# Altium PCB PCB_MAIN_BOARD.PcbDoc
Units mm, origin at the board's own origin, x right, y up, seen from the top; angles counter-clockwise.
Board outline 70 x 130 mm, 2 copper layers (Top Layer, Bottom Layer); 42 components, 46 nets, 234 pads, 21 vias.
Unrouted connection lines stored in the file: 7.
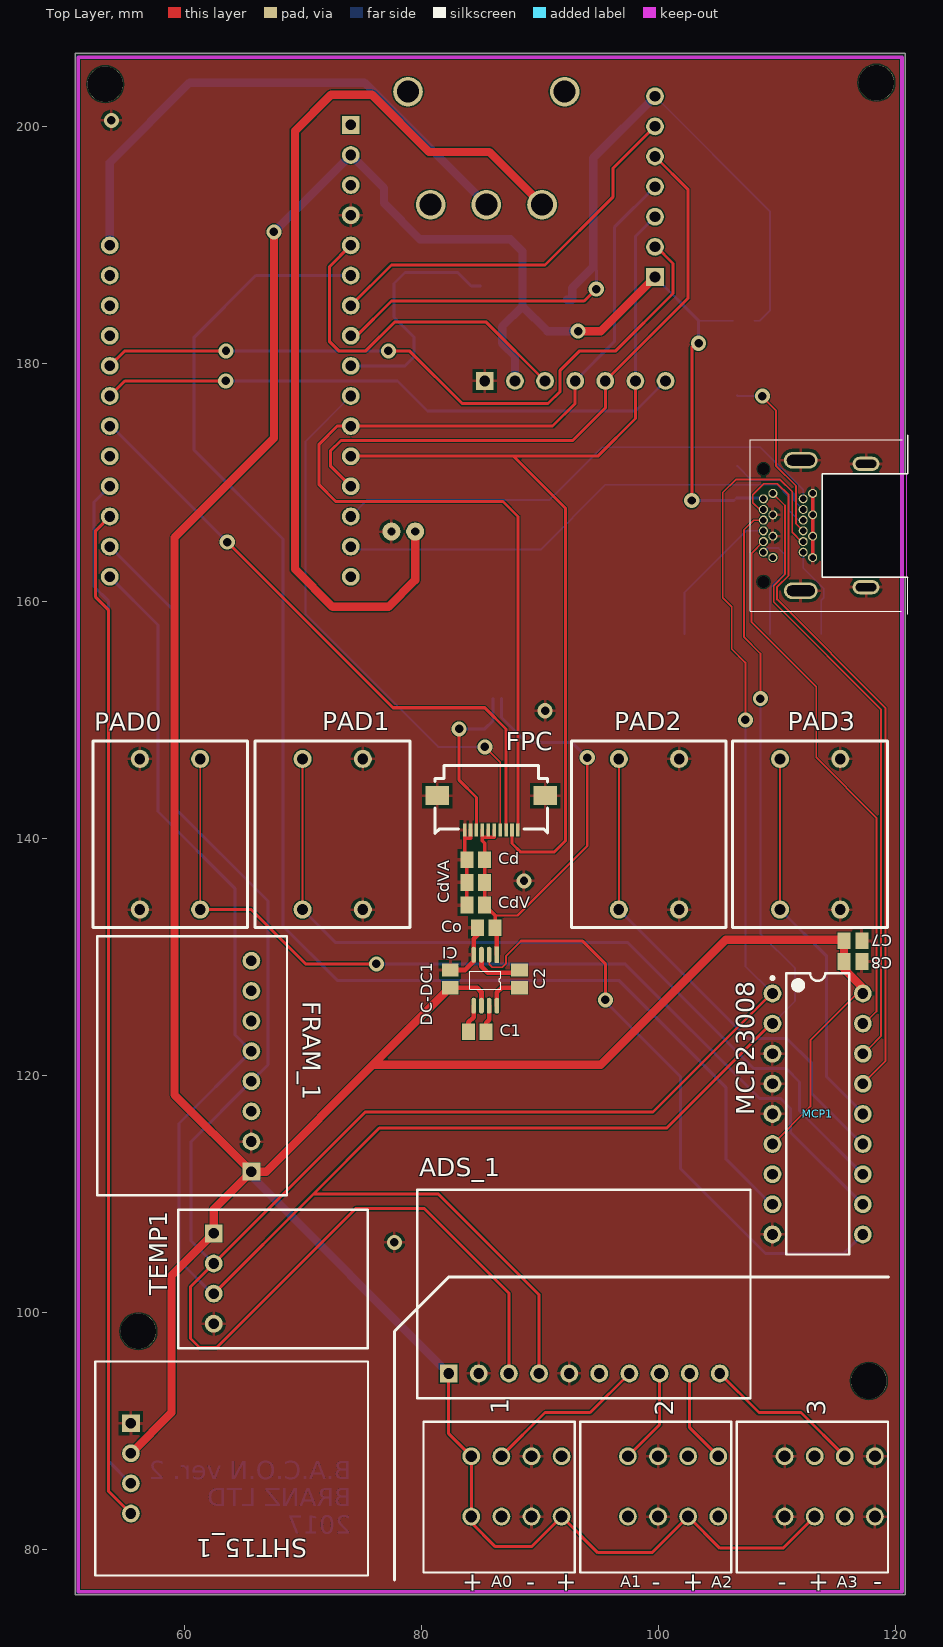
[diagram p0: Top Layer view]
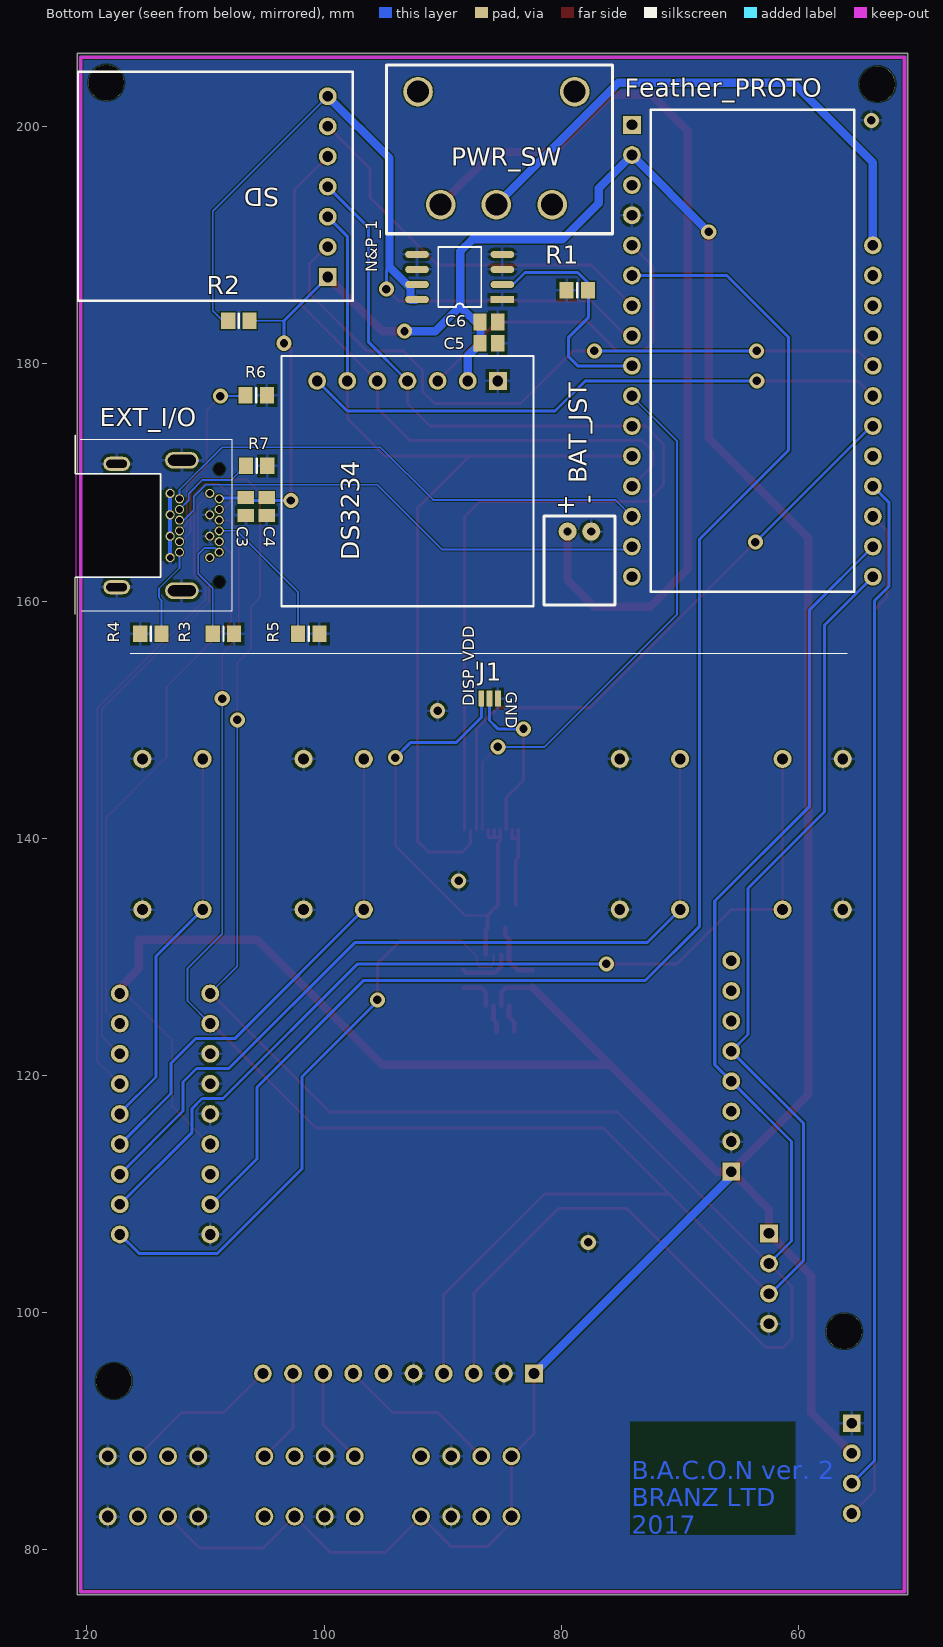
[diagram p1: Bottom Layer view, seen from below]

## Layer stack, top to bottom
Top Solder: solder mask 0.0102, Solder Resist, Dk 3.5
Top Layer: signal copper 0.0356
Dielectric 1: dielectric 0.32, FR-4, Dk 4.8
Bottom Layer: signal copper 0.0356
Bottom Solder: solder mask 0.0102, Solder Resist, Dk 3.5

## Board outline
50.8,76.2 120.8,76.2 120.8,143.764 120.8,162.01 113.805,162.01 113.805,170.724 120.8,170.724 120.8,206.2 50.8,206.2
cut-out: 120.906,170.713 113.805,170.713 113.805,162.014 120.906,162.014

## Design rules (kind name [scope] priority, off if disabled: settings)
AssemblyTestpoint [All] p1: testpointundercomponent=TRUE minsize=1.016 maxsize=2.54 preferedsize=1.524 minholesize=0.3 maxholesize=1.016 preferedholesize=0.813 testpointgrid=0.025 usegrid=TRUE gridtolerance=0 allowsidetop=TRUE allowsidebottom=TRUE
Clearance [All] p1: gap=0.102
HoleSize [All] p1: absolutevalues=TRUE maxlimit=6 minlimit=0.3 maxpercent=80.000 minpercent=20.000
HoleToHoleClearance [All] p1: gap=0.2 allowstackedmicrovias=TRUE
MinimumAnnularRing [All] p1: minimumring=0.152
PolygonConnect [All] p1: connectstyle=Relief reliefconductorwidth=0.254 reliefentries=4 polygonreliefangle="90 Angle" airgapwidth=0.254
RoutingVias [All] p1: holewidth=0.2 width=1 viastyle="Through Hole" minholewidth=0.711 minwidth=1.27 maxholewidth=0.711 maxwidth=1.27
SilkToSilkClearance [All] p1: silktosilkclearance=0.2
SilkToSolderMaskClearance [IsPad] p1: minsilkscreentomaskgap=0.1 clearancetoexposedcopper=TRUE
SolderMaskExpansion [All] p1: expansion=0.102
Width [All] p1: maxlimit=0.7 minlimit=0.152 preferedwidth=0.254
25 further rules are at their usual default settings.

## Components (designator, comment, footprint, x,y, rotation, side; value= is the part's Value field where it differs from the comment)
1 "SPRING_CONN" QUICK_CONN 91.821,87.884 r270 top
2 "SPRING_CONN" QUICK_CONN 105.029,87.884 r270 top
3 "SPRING_CONN" QUICK_CONN 118.237,87.884 r270 top
ADS_1 "ADS1115" ADS1115 82.296,94.869 r90 top
BAT_JST "JST_CON" JST_CONN 77.47,165.862 r270 bottom
C1 "Cap Semi" C0805 84.709,123.698 r180 top
C2 "Cap Semi" C0805 88.265,128.143 r90 top
C3 "Cap Semi" C0805 106.591,167.97 r270 bottom
C4 "Cap Semi" C0805 104.826,167.97 r90 bottom
C5 "Cap Semi" C0805 86.106,181.737 r0 bottom
C6 "Cap Semi" C0805 86.106,183.528 r180 bottom
C7 "Cap Semi" C0805 116.383,131.369 r0 top
C8 "Cap Semi" C0805 116.383,129.603 r180 top
Cd "Cap Semi" C0805 84.582,138.176 r180 top
CdV "Cap Semi" C0805 84.582,134.366 r180 top
CdVA "Cap Semi" C0805 84.582,136.271 r180 top
CI "Cap Semi" C0805 82.423,128.143 r270 top
Co "Cap Semi" C0805 85.471,132.461 r180 top
DC-DC1 "TPS60241" TPS60241 86.36,130.175 r270 top
DS3234 "DS3234" DS3234_FOOTPRINT 85.344,178.562 r270 bottom
EXT_I/O "Mini_displayport" CONN_Displayport 108.839,166.37 r270 bottom
Feather_PROTO "Feather_M0" Feather_M0 74.041,200.152 r180 bottom
FPC "CONN_FPC" CONN_FPC 88.138,140.796 r180 top
FRAM_1 "FRAM" FRAM 65.659,111.887 r180 top
J1 "DISP_JUMPER" DISP_Jumper 85.344,151.765 r270 bottom
MCP1 "MCP23008" MCP23008 109.601,126.911 r0 top
N&P_1 "N+P_MOSFET" SOP8 84.963,185.42 r0 bottom
PAD0 "Button" Button_footprint 61.341,146.685 r270 top
PAD1 "Button" Button_footprint 69.977,133.985 r90 top
PAD2 "Button" Button_footprint 96.647,133.985 r90 top
PAD3 "Button" Button_footprint 110.236,133.985 r90 top
PWR_SW "Switch" Switch_footprint 85.471,193.421 r0 bottom
R1 "Res3" 6-0805_N 78.651,186.22 r0 bottom
R2 "Res3" 6-0805_N 107.188,183.642 r0 bottom
R3 "Res3" 6-0805_N 108.483,157.226 r180 bottom
R4 "Res3" 6-0805_N 114.605,157.226 r180 bottom
R5 "Res3" 6-0805_N 101.295,157.226 r180 bottom
R6 "Res3" 6-0805_N 105.715,177.343 r180 bottom
R7 "Res3" 6-0805_N 105.689,171.399 r180 bottom
SD "SD_BREAKOUT" SD_BREAKOUT_FOOTPRINT 99.695,187.325 r0 bottom
SHT15_1 "SHT15 Breakout" SHT15_BREAKOUT_FOOTPRINT 55.499,90.678 r0 top
TEMP1 "Si7051" Si7051_Footprint 62.484,106.68 r0 top

## Footprints (in the part's own frame and the unit in brackets; to place one, negate y for a bottom-side part, rotate by r counter-clockwise, add the part's x,y. Pads: shape width x height; smd on the part's side, far side on the other; paste and mask are expansions set on the pad)
6-0805_N [mm] "Chip Resistor, Body 2.0x1.2mm, IPC Medium Density"
  rect 1.2x1.4 smd: 1(-0.9,0) 2(0.9,0)
  silkscreen extent 0,-0.6 0,0.6, body extent -1.07,-0.7 1.07,0.7, height 0.7
ADS1115 [mm]
  rect 1.5x1.5 hole 0.9: 1(0,0)
  round 1.5 hole 0.9: 2(0,-2.54) 3(0,-5.08) 4(0,-7.62) 5(0,-10.16) 6(0,-12.7) 7(0,-15.24) 8(0,-17.78) 9(0,-20.32) 10(0,-22.86)
  silkscreen extent -2.1,-25.45 15.5,2.65
Button_footprint [mil]
  round 60 hole 35.43: 1(0,0) 1(500,0) 2(0,-200) 2(500,-200)
  silkscreen extent -59,-356 559,157
C0805 [mm] "Chip Capacitor, Body 2.0x1.3mm, IPC High Density"
  rect 1.1x1.4 smd: 1(-0.75,0) 2(0.75,0)
  body extent -1.1,-0.72 1.1,0.72, height 1.4
CONN_Displayport [mm]
  oval 1.4x2.85 hole 0.9 slot 2.35 at 90 deg: 0(-5.5,-3.15) 0(5.5,-3.15)
  oval 1.2x2.25 hole 0.7 slot 1.74 at 90 deg: 0(-5.2,-8.65) 0(5.2,-8.65)
  round 0.77 hole 0.55: 1(-2.7,-4.15) 2(-2.7,-0.8) 3(-2.25,-3.35) 4(-2.25,0) 5(-1.35,-3.35) 6(-1.35,0) 7(-0.9,-4.15) 8(-0.9,-0.8) 9(-0.45,-3.35) 10(-0.45,0) 11(0.45,-3.35) 12(0.45,0) 13(0.9,-4.15) 14(0.9,-0.8) 15(1.35,-3.35) 16(1.35,0) 17(2.25,-3.35) 18(2.25,0) 19(2.7,-4.15) 20(2.7,-0.8)
  round 0 hole 1 unplated: 21(-4.75,0) 21(4.75,0)
  silkscreen extent -7.6,-12.15 7.5,1.1
CONN_FPC [mm]
  rect 0.3x1.1 smd: 1(0,0.1) 2(0.5,0.1) 3(1,0.1) 4(1.5,0.1) 5(2,0.1) 6(2.5,0.1) 7(3,0.1) 8(3.5,0.1) 9(4,0.1) 10(4.5,0.1)
  rect 2x1.6 smd: 9(-2.3,-2.8) 9(6.8,-2.8)
  silkscreen extent -2.5,-5.35 7,0.4
DISP_Jumper [mm]
  rect 1.35x0.5 smd: 1(0,0) 2(0,-0.7) 3(0,-1.4)
DS3234_FOOTPRINT [mm]
  rect 1.5x1.5 hole 0.9: 1(0,0)
  round 1.5 hole 0.9: 2(0,-2.54) 3(0,-5.08) 4(0,-7.62) 5(0,-10.16) 6(0,-12.7) 7(0,-15.24)
  silkscreen extent -2.1,-18.25 19,3, body extent -2.1,-18.25 19,3.05, height 7.4
Feather_M0 [mm]
  rect 1.5x1.5 hole 0.9: 1(0,0)
  round 1.5 hole 0.9: 2(0,-2.54) 3(0,-5.08) 4(0,-7.62) 5(0,-10.16) 6(0,-12.7) 7(0,-15.24) 8(0,-17.78) 9(0,-20.32) 10(0,-22.86) 11(0,-25.4) 12(0,-27.94) 13(0,-30.48) 14(0,-33.02) 15(0,-35.56) 16(0,-38.1) 17(20.32,-38.1) 18(20.32,-35.56) 19(20.32,-33.02) 20(20.32,-30.48) 21(20.32,-27.94) 22(20.32,-25.4) 23(20.32,-22.86) 24(20.32,-20.32) 25(20.32,-17.78) 26(20.32,-15.24) 27(20.32,-12.7) 28(20.32,-10.16)
  silkscreen extent 1.58,-39.37 18.74,1.27, body extent -1.1,-44.1 21.35,6, height 7
FRAM [mm]
  rect 1.5x1.5 hole 0.9: 1(0,0)
  round 1.5 hole 0.9: 2(0,-2.54) 3(0,-5.08) 4(0,-7.62) 5(0,-10.16) 6(0,-12.7) 7(0,-15.24) 8(0,-17.78)
  silkscreen extent -3,-19.85 13,2, body extent -3,-19.85 13,2, height 6
JST_CONN [mil]
  round 60 hole 27.56: 1(0,0) 2(0,-78.74)
  silkscreen extent -51,-157 244,79, body extent -49,-157 242,79, height 197
MCP23008 [mm]
  round 1.5 hole 0.9: 1(0,0) 2(0,-2.54) 3(0,-5.08) 4(0,-7.62) 5(0,-10.16) 6(0,-12.7) 7(0,-15.24) 8(0,-17.78) 9(0,-20.32) 10(7.62,-20.32) 11(7.62,-17.78) 12(7.62,-15.24) 13(7.62,-12.7) 14(7.62,-10.16) 15(7.62,-7.62) 16(7.62,-5.08) 17(7.62,-2.54) 18(7.62,0)
  silkscreen extent -0.12,-22.01 6.46,1.69, body extent 0.21,-21.96 7.41,1.64, height 5.08
QUICK_CONN [mm]
  round 1.5 hole 1: 1(0,-7.62) 1(5.08,-7.62) 2(0,-5.08) 2(5.08,-5.08) 3(0,-2.54) 3(5.08,-2.54) 4(0,0) 4(5.08,0)
  silkscreen extent -2.9,-11.65 9.8,1.1, body extent -2.9,-11.65 9.8,1.1, height 13.8
SD_BREAKOUT_FOOTPRINT [mm]
  rect 1.5x1.5 hole 0.9: 1(0,0)
  round 1.5 hole 0.9: 2(0,-2.54) 3(0,-5.08) 4(0,-7.62) 5(0,-10.16) 6(0,-12.7) 7(0,-15.24)
  silkscreen extent -2.1,-17.3 21.05,2, body extent -2.1,-17.35 21.05,2, height 6.1
SHT15_BREAKOUT_FOOTPRINT [mm]
  rect 1.5x1.5 hole 0.9: 1(0,0)
  round 1.5 hole 0.9: 2(0,-2.54) 3(0,-5.08) 4(0,-7.62)
  silkscreen extent -3,-12.85 20,5.2, body extent -3,-12.9 20,5.2, height 5.7
Si7051_Footprint [mm]
  rect 1.5x1.5 hole 0.9: 1(0,0)
  round 1.5 hole 0.9: 2(0,-2.54) 3(0,-5.08) 4(0,-7.62)
  silkscreen extent -3,-9.7 13,2, body extent -3,-9.7 13,2, height 5.7
SOP8 [mm]
  rect 2x0.6 smd: 1(0,0)
  oval 2x0.6 smd: 2(0,-1.27) 3(0,-2.54) 4(0,-3.81) 5(7.2,-3.81) 6(7.2,-2.54) 7(7.2,-1.27) 8(7.2,0)
  silkscreen extent 1.79,-4.44 5.42,0.64, body extent 1.8,-4.45 5.4,0.6, height 1.75
Switch_footprint [mm]
  round 2.5 hole 1.85: 0(-6.605,-9.53) 0(6.605,-9.53) 1(4.7,0) 2(0,0) 3(-4.7,0)
  Mechanical 1 keep-out lines w0.254: -9.4,2.1 8.9,2.1 8.9,-11.4 -9.4,-11.4 -9.4,1.35 -9.4,2.1
  silkscreen extent -9.8,-11.8 9.25,2.45
TPS60241 [mm]
  rect 1.35x0.4 smd: 1(0,0)
  oval 1.35x0.4 smd: 2(0,-0.65) 3(0,-1.3) 4(0,-1.95) 5(4.3,-1.95) 6(4.3,-1.3) 7(4.3,-0.65) 8(4.3,0)
  silkscreen extent 1.41,-2.28 2.89,0.33

## Part data
C1 C2 C3 C4 C5 C6 C7 C8 Cd CdV CdVA CI Co: "Capacitor (Semiconductor SIM Model)"
R1 R2 R3 R4 R5 R6 R7: "Resistor"
SHT15_1: library part SHT15_BREAKOUT

## Free pads (board coordinates)
  round 3 hole 3 unplated: 38(53.34,203.581) 38(56.134,98.425) 38(117.729,94.234) 39(118.364,203.708)

## Via types
v1: diameter 1.27, hole 0.711, Top Layer to Bottom Layer, 21 vias

## Nets (pads, with @x,y where several pads share a name; then routed paths per layer and width w, separated by ;. In a path a pad name is that pad's centre, name@x,y a point inside that pad or via, vN(x,y) a via of type N, cw(c..) or ccw(c..) an arc to the next point about the centre after c; other vN are vias at no path point)
3.3V: 1.1 1.4 2.3 3.2 ADS_1.1 C3.1 C4.2 C5.2 C6.1 C7.1 C8.2 CI.2 DC-DC1.6 DS3234.2 EXT_I/O.4 Feather_PROTO.2 FRAM_1.1 MCP1.6 MCP1.18 R2.1 SD.1 SHT15_1.2 TEMP1.1 | length 362.2
  Top Layer w0.152: MCP1.6 109.626,114.211 112.801,117.386 112.801,122.961 MCP1.18@117.221,127.381
  Top Layer w0.254: ADS_1.1 82.296,89.789 84.201,87.884 84.201,82.804 84.201,82.296 86.233,80.264 89.281,80.264 91.821,82.804 94.869,79.756 99.441,79.756 102.489,82.804 105.156,80.137 110.49,80.137 3.2@113.157,82.804 ; v1(102.794,168.478) 102.794,181.407 v1@103.378,181.991
  Top Layer w0.4: CI.2 84.697,127.393 85.06,127.03 DC-DC1.6
  Top Layer w0.7: SHT15_1.2 58.928,91.567 58.928,103.124 TEMP1.1 62.484,108.712 FRAM_1.1 ; FRAM_1.1@65.659,111.506 FRAM_1.1 ; v1(67.564,191.135) 67.564,173.736 59.182,165.354 59.182,118.364 FRAM_1.1 ; CI.2 75.934,120.904 ; v1(93.218,182.753) 95.123,182.753 SD.1 ; MCP1.18@117.221,127.381 115.632,128.97 115.632,131.445 105.664,131.445 95.123,120.904 75.934,120.904 ; FRAM_1.1 66.917,111.887 75.934,120.904
  Bottom Layer w0.152: 103.378,183.642 R2.1 ; C3.1@106.349,168.478 C3.1@106.565,168.694 ; EXT_I/O.4@108.765,168.694 EXT_I/O.4
  Bottom Layer w0.254: SD.1 103.378,183.642 v1(103.378,181.737) ; v1(102.794,168.478) C3.1@106.349,168.478 ; C3.1@106.565,168.694 EXT_I/O.4@108.765,168.694
  Bottom Layer w0.7: FRAM_1.1@65.659,111.506 ADS_1.1 ; v1(67.564,191.135) Feather_PROTO.2 76.835,194.818 76.835,193.548 79.883,190.5 87.503,190.5 88.519,189.484 88.519,184.847 ; DS3234.2 87.884,180.659 86.806,181.737 86.806,183.134 88.519,184.847 ; v1(93.218,182.753) 90.613,182.753 88.519,184.847
ALARM: DS3234.3 Feather_PROTO.5 | length 30.4
  Top Layer w0.254: Feather_PROTO.5 72.263,188.214 72.263,181.864 73.025,181.102 75.311,181.102 77.724,183.515 85.471,183.515 DS3234.3
BAT: Feather_PROTO.28 PWR_SW.2 | length 45.8
  Bottom Layer w0.7: Feather_PROTO.28 53.721,196.977 60.452,203.708 75.184,203.708 PWR_SW.2
GND: 1.3 2.2 3.1 3.4 ADS_1.2 ADS_1.5 BAT_JST.1 C3.2 C4.1 C5.1 C6.2 C7.2 C8.1 Cd.2 CdV.2 CdVA.2 CI.1 Co.2 DC-DC1.4 DS3234.1 EXT_I/O.0 EXT_I/O.1 EXT_I/O.7 EXT_I/O.8 EXT_I/O.13 EXT_I/O.14 EXT_I/O.19 Feather_PROTO.4 FPC.9 FPC.10 FRAM_1.2 J1.1 MCP1.3 MCP1.4 MCP1.5 MCP1.9 N&P_1.1 N&P_1.3 N&P_1.4 N&P_1.5 N&P_1.6 PAD0.2 PAD1.2 PAD2.2 PAD3.2 R1.2 R3.2 R4.1 R5.2 R6.2 R7.2 SHT15_1.1 TEMP1.4 | length 23.4
  Top Layer w0.3: Cd.2@83.638,138.37 83.638,140.009 ; FPC.10 83.638,140.009 ; CdV.2 CdVA.2 Cd.2 ; FPC.9@84.138,140.696 84.138,140.018 84.129,140.009 83.638,140.009 ; EXT_I/O.19 EXT_I/O.13 EXT_I/O.1
  Top Layer w0.4: CI.1 83.681,128.893 84.41,129.622 DC-DC1.4 84.41,131.527 84.721,131.838 Co.2
  Bottom Layer w0.3: EXT_I/O.19 EXT_I/O.1
  other v1: 77.724,105.918 88.646,136.398 90.424,150.749 53.848,200.533
MISO: DS3234.5 Feather_PROTO.13 SD.5 | length 53.6
  Top Layer w0.254: Feather_PROTO.13 72.315,171.398 72.315,172.645 73.21,173.54 92.768,173.54 95.504,176.276 DS3234.5 102.489,185.547 102.489,194.691 SD.5
MOSI: DS3234.6 Feather_PROTO.12 FPC.2 SD.3 | length 83.6
  Top Layer w0.254: Feather_PROTO.12 87.757,172.212 ; FPC.2 87.638,139.565 88.374,138.829 91.187,138.829 92.139,139.781 92.139,167.83 87.757,172.212 ; DS3234.6 98.044,175.387 94.869,172.212 87.757,172.212
  Bottom Layer w0.254: DS3234.6 98.044,190.754 SD.3
Net1_2: 1.2 ADS_1.7 | length 13.7
  Top Layer w0.254: 1.2@86.741,87.884 90.424,91.567 94.234,91.567 ADS_1.7
Net2_1: 2.1 ADS_1.8 | length 8.1
  Top Layer w0.254: 2.1@97.409,87.884 100.076,90.551 ADS_1.8
Net2_4: 2.4 ADS_1.9 | length 8
  Top Layer w0.254: ADS_1.9 102.616,90.297 2.4@105.029,87.884
Net3_3: 3.3 ADS_1.10 | length 13.4
  Top Layer w0.254: ADS_1.10 108.458,91.567 112.014,91.567 3.3@115.697,87.884
NetBAT_JST_2: BAT_JST.2 PWR_SW.1 | length 79.4
  Top Layer w0.7: BAT_JST.2 79.47,161.766 77.216,159.512 72.517,159.512 69.342,162.687 69.342,199.644 72.39,202.692 75.819,202.692 80.645,197.866 85.726,197.866 PWR_SW.1
NetC1_1: C1.1 DC-DC1.7 | length 2.3
  Top Layer w0.4: C1.1 85.459,124.448 85.71,124.699 DC-DC1.7
NetC1_2: C1.2 DC-DC1.5 | length 2.4
  Top Layer w0.4: C1.2 83.959,124.472 84.41,124.923 DC-DC1.5
NetC2_1: C2.1 DC-DC1.8 | length 3.2
  Top Layer w0.4: DC-DC1.8 86.36,127 86.753,127.393 C2.1
NetC2_2: C2.2 DC-DC1.3 | length 4.5
  Top Layer w0.4: DC-DC1.3 85.06,129.189 85.598,128.651 88.023,128.651 C2.2
NetCd_1: Cd.1 CdV.1 CdVA.1 Co.1 DC-DC1.1 FPC.5 FPC.6 FPC.7 J1.3 | length 40.7
  Top Layer w0.2: 86.221,133.489 88.112,133.489 93.98,139.357 v1(93.98,146.799)
  Top Layer w0.3: FPC.7 85.138,140.081 ; CdV.1 CdVA.1 Cd.1 85.332,139.59 85.138,139.784 85.138,140.081 ; CdV.1@85.471,134.239 86.221,133.489 Co.1 ; FPC.6@85.638,140.284 FPC.6 ; FPC.5 86.138,140.081 85.138,140.081
  Top Layer w0.4: Co.1 86.36,132.322 DC-DC1.1
  Bottom Layer w0.254: J1.3 86.744,150.187 88.875,148.057 92.723,148.057 v1(93.98,146.799)
NetDC-DC1_2: DC-DC1.2 MCP1.10 | length 52.2
  Top Layer w0.152: DC-DC1.2 85.71,129.372 85.967,129.114 86.823,129.114 87.122,129.413 87.122,130.048 88.392,131.318
  Top Layer w0.254: 88.392,131.318 93.599,131.318 95.504,129.413 v1(95.504,126.365)
  Bottom Layer w0.254: v1(95.504,126.365) 95.504,126.238 101.854,119.888 101.854,112.128 109.004,104.978 115.595,104.978 117.221,106.604 MCP1.10@117.221,107.061
NetDS3234_7: DS3234.7 Feather_PROTO.23 | length 49.5
  Top Layer w0.254: Feather_PROTO.23 54.991,178.562 v1(63.5,178.562)
  Bottom Layer w0.254: v1(63.5,178.562) 77.978,178.562 80.518,176.022 98.044,176.022 DS3234.7
NetEXT_I/O_2: EXT_I/O.2 MCP1.16 | length 52.3
  Top Layer w0.152: EXT_I/O.2 110.655,168.054 110.655,162.255 109.703,161.303 109.703,159.918 118.745,150.876 118.745,123.304 117.742,122.301 MCP1.16@117.221,122.301
NetEXT_I/O_5: EXT_I/O.5 R7.1 | length 7.5
  Bottom Layer w0.152: R7.1 106.629,171.399 107.823,170.205 110.261,170.205 111.417,169.05 111.417,168.492 EXT_I/O.5
NetEXT_I/O_6: EXT_I/O.6 MCP1.15 | length 59.6
  Top Layer w0.152: EXT_I/O.6 108.518,167.72 107.937,168.3 107.937,168.948 108.877,169.888 110.02,169.888 110.96,168.948 110.96,162.154 109.995,161.188 109.995,160.134 119.126,151.003 119.126,121.196 MCP1.15@117.691,119.761
NetEXT_I/O_11: EXT_I/O.11 R6.1 | length 14.9
  Top Layer w0.152: v1@108.75,177.216 109.893,176.073 109.893,171.399 111.585,169.707 111.585,169.234 111.585,166.524 EXT_I/O.11
  Bottom Layer w0.152: R6.1 106.678,177.279 v1(108.75,177.279)
NetEXT_I/O_12: EXT_I/O.12 R5.1 | length 12.3
  Bottom Layer w0.152: R5.1@102.188,157.226 102.188,160.731 107.377,165.92 EXT_I/O.12
NetEXT_I/O_16: EXT_I/O.16 MCP1.17 | length 46
  Top Layer w0.152: EXT_I/O.16 107.823,164.004 107.823,158.242 113.284,152.781 113.284,146.812 118.364,141.732 118.364,125.387 117.348,124.371 MCP1.17
NetEXT_I/O_17: EXT_I/O.17 R4.2 | length 7.7
  Bottom Layer w0.152: EXT_I/O.17 112.189,162.788 113.919,161.058 113.919,160.274 113.712,160.067 R4.2@113.712,157.226
NetEXT_I/O_18: EXT_I/O.18 R3.1 | length 9.4
  Bottom Layer w0.152: EXT_I/O.18 109.184,164.465 110.109,164.465 110.617,163.957 110.617,162.306 109.388,161.077 R3.1@109.388,157.226
NetFeather_PROTO_6: Feather_PROTO.6 MCP1.8 | length 122.6
  Bottom Layer w0.254: Feather_PROTO.6 66.04,187.452 60.833,182.245 60.833,172.72 68.326,165.227 68.326,132.588 72.898,128.016 96.647,128.016 105.664,118.999 105.664,112.966 MCP1.8@109.55,109.08
NetFeather_PROTO_7: Feather_PROTO.7 SD.6 | length 33.3
  Top Layer w0.254: Feather_PROTO.7 77.47,188.341 90.424,188.341 96.139,194.056 96.139,196.469 SD.6
NetFeather_PROTO_8: Feather_PROTO.8 N&P_1.7 N&P_1.8 R2.2 SD.7 | length 68.5
  Top Layer w0.254: Feather_PROTO.8 74.549,182.372 77.47,185.293 93.726,185.293 v1(94.742,186.309)
  Bottom Layer w0.152: SD.7 109.388,192.872 109.388,184.492 108.538,183.642 R2.2
  Bottom Layer w0.254: 94.488,188.214 94.475,188.201 94.742,187.935 v1(94.742,186.309)
  Bottom Layer w0.7: N&P_1.8@92.265,185.395 92.71,185.395 92.71,186.398 94.475,188.163 ; 94.488,188.214 94.488,197.358 SD.7
NetFeather_PROTO_9: Feather_PROTO.9 N&P_1.2 R1.1 | length 20.7
  Bottom Layer w0.254: Feather_PROTO.9 78.613,179.832 79.375,180.594 79.375,182.245 77.683,183.937 77.683,185.801 77.683,186.776 78.613,187.706 83.058,187.706 84.201,186.563 N&P_1.2@84.963,186.563
NetFeather_PROTO_10: Feather_PROTO.10 FPC.4 | length 47.3
  Top Layer w0.152: v1(85.344,147.701) 86.638,146.407 FPC.4
  Bottom Layer w0.152: Feather_PROTO.10 70.231,173.482 70.231,158.877 81.407,147.701 v1(85.344,147.701)
NetFeather_PROTO_19: Feather_PROTO.19 SHT15_1.4 | length 85.8
  Top Layer w0.254: Feather_PROTO.19 52.527,165.938 52.527,160.325 53.594,159.258 53.594,84.963 SHT15_1.4
NetFeather_PROTO_20: Feather_PROTO.20 SHT15_1.3 | length 85.9
  Bottom Layer w0.254: Feather_PROTO.20 52.384,168.335 52.384,161.23 53.594,160.02 53.594,87.503 SHT15_1.3
NetFeather_PROTO_22: Feather_PROTO.22 FPC.3 | length 52.5
  Top Layer w0.254: v1(63.627,164.973) 77.597,151.003 85.344,151.003 87.138,149.209 FPC.3
  Bottom Layer w0.254: Feather_PROTO.22 53.848,174.752 v1(63.627,164.973)
NetFeather_PROTO_24: Feather_PROTO.24 SD.2 | length 59.3
  Top Layer w0.254: Feather_PROTO.24 54.979,181.09 v1(63.522,181.09) ; v1(77.213,181.09) 78.978,181.09 78.995,181.072 79.024,181.072 83.439,176.657 90.678,176.657 91.694,177.673 91.694,179.451 93.345,181.102 96.393,181.102 101.219,185.928 101.219,188.468 SD.2@99.822,189.865
  Bottom Layer w0.254: v1(63.522,181.09) v1(77.213,181.09)
NetFPC_8: FPC.8 J1.2 | length 14.1
  Top Layer w0.254: v1(83.185,149.225) 83.185,144.892 84.638,143.439 FPC.8
  Bottom Layer w0.254: v1(83.185,149.225) 85.344,149.225 86.044,149.925 J1.2
NetMCP1_11: MCP1.11 PAD0.1 | length 80
  Top Layer w0.152: PAD0.1@61.341,133.985 PAD0.1@61.341,146.685
  Top Layer w0.254: PAD0.1@61.341,133.985 65.659,133.985 70.231,129.413 v1(76.2,129.413)
  Bottom Layer w0.254: v1(76.2,129.413) 97.155,129.413 108.521,118.046 110.287,118.046 111.125,117.208 111.125,115.214 MCP1.11@117.215,109.125
NetMCP1_12: MCP1.12 PAD1.1 | length 70.6
  Top Layer w0.152: PAD1.1@69.977,133.985 PAD1.1@69.977,146.685
  Bottom Layer w0.254: PAD1.1@69.977,133.985 72.771,131.191 97.409,131.191 108.026,120.574 110.757,120.574 111.887,119.444 111.887,116.992 MCP1.12@117.215,111.665
NetMCP1_13: MCP1.13 PAD2.1 | length 42.9
  Top Layer w0.152: PAD2.1@96.647,133.985 PAD2.1@96.647,146.685
  Bottom Layer w0.254: PAD2.1@96.647,133.985 107.531,123.101 110.833,123.101 112.903,121.031 112.903,118.478 MCP1.13@117.196,114.186
NetMCP1_14: MCP1.14 PAD3.1 | length 32.8
  Top Layer w0.152: PAD3.1@110.236,133.985 PAD3.1@110.236,146.685
  Bottom Layer w0.254: PAD3.1@110.236,133.985 114.173,130.048 114.173,119.875 MCP1.14@117.259,116.789
RX: EXT_I/O.3 Feather_PROTO.14 | length 42.8
  Bottom Layer w0.152: Feather_PROTO.14 75.438,168.529 90.805,168.529 95.25,172.974 108.585,172.974 112.189,169.37 EXT_I/O.3
SCK: DS3234.4 Feather_PROTO.11 FPC.1 SD.4 | length 91.8
  Top Layer w0.254: FPC.1 88.138,167.132 86.868,168.402 72.771,168.402 71.374,169.799 71.374,173.228 72.898,174.752 Feather_PROTO.11 91.059,174.752 92.964,176.657 DS3234.4
  Bottom Layer w0.254: DS3234.4 96.266,181.864 96.266,191.516 SD.4
SCL: ADS_1.3 EXT_I/O.15 Feather_PROTO.18 FRAM_1.4 MCP1.1 TEMP1.2 | length 230.2
  Top Layer w0.152: v1(107.315,149.987) 107.315,154.813 106.172,155.956 106.172,159.512 105.41,160.274 105.41,169.151 106.502,170.243 108.605,170.243 110.261,170.243 111.265,169.24 111.265,165.798 112.043,165.02 EXT_I/O.15
  Top Layer w0.254: ADS_1.3 87.376,101.638 80.252,108.762 74.442,108.762 62.746,97.066 61.284,97.066 60.534,97.816 60.534,102.19 TEMP1.2 75.251,116.907 99.521,116.907 MCP1.1@109.601,126.987
  Bottom Layer w0.152: v1(107.315,149.987) 107.315,129.222 MCP1.1@109.576,126.962
  Bottom Layer w0.254: Feather_PROTO.18 59.055,159.258 59.055,142.701 67.056,134.7 67.056,120.904 FRAM_1.4 60.579,114.427 60.579,106.045 TEMP1.2
SDA: ADS_1.4 EXT_I/O.10 Feather_PROTO.17 FRAM_1.5 MCP1.2 TEMP1.3 | length 201.5
  Top Layer w0.152: v1(108.585,151.765) 108.585,155.575 107.188,156.972 107.188,165.989 108.019,166.82 EXT_I/O.10
  Top Layer w0.254: TEMP1.3 70.894,110.01 ; ADS_1.4 89.916,101.511 81.417,110.01 70.894,110.01 ; MCP1.2@109.601,124.841 109.601,124.485 100.686,115.57 76.454,115.57 70.894,110.01
  Bottom Layer w0.152: v1(108.585,151.765) 108.585,131.953 111.506,129.032 111.506,126.276 MCP1.2
  Bottom Layer w0.254: Feather_PROTO.17 57.785,157.988 57.785,142.256 64.262,135.779 64.262,123.444 FRAM_1.5 59.563,115.951 59.563,104.394 62.357,101.6 TEMP1.3
TX: EXT_I/O.9 Feather_PROTO.15 | length 42.4
  Bottom Layer w0.152: Feather_PROTO.15 74.295,164.338 90.043,164.338 95.504,169.799 109.982,169.799 110.985,168.796 110.985,167.653 111.818,166.82 EXT_I/O.9
USB: Feather_PROTO.26
pads on no net: ADS_1.6 EXT_I/O.20 EXT_I/O.21 Feather_PROTO.1 Feather_PROTO.3 Feather_PROTO.16 Feather_PROTO.21 Feather_PROTO.25 Feather_PROTO.27 FRAM_1.3 FRAM_1.6 FRAM_1.7 FRAM_1.8 MCP1.7 PWR_SW.0 PWR_SW.3

## Polygon pours and split planes (outlines as drawn)
GND on Bottom Layer "Bottom Layer-GND" (solid, remove dead copper, pour order 0): 50.8,206.248 50.927,206.121 120.777,206.121 120.777,76.2 50.8,76.2
GND on Top Layer "Top Layer-GND" (solid, remove dead copper, pour order 2): 50.8,206.248 50.927,206.121 120.777,206.121 120.777,76.2 50.8,76.2

## Keep-outs
Top Overlay:
  lines w0.254: 77.724,77.47 77.724,98.425 82.296,102.997 119.373,102.997
Keep-Out Layer:
  lines w0.3: 51.054,76.454 51.054,205.867 120.523,205.867 120.523,76.454 51.054,76.454

## Other copper
Bottom Layer:
  text "B.A.C.O.N ver. 2 / BRANZ LTD / 2017" at 74.066,81.369 h1.52

## Silkscreen, mask and mechanical layers (free items; w line width, h text height)
Top Overlay:
  text "A0" at 85.89,76.835 h1
  text "A1" at 96.774,76.835 h1
  text "A2" at 104.419,76.797 h1
  text "A3" at 115.024,76.81 h1
  text "-" at 118.097,76.581 h1.52
  text "+" at 83.439,76.556 h1.52
  text "-" at 88.824,76.556 h1.52
  text "+" at 91.338,76.543 h1.52
  text "-" at 99.428,76.543 h1.52
  text "-" at 110.033,76.543 h1.52
  text "+" at 112.624,76.543 h1.52
  text "+" at 102.019,76.53 h1.52
Bottom Overlay:
  lines w0.1: 55.88,155.575 116.332,155.575

## Text inside footprints (layer, text, board x,y; h text height)
BAT_JST: Bottom Overlay "+" at 80.27,168.962 h1.52 r90; Bottom Overlay "-" at 78.17,168.962 h1.52 r90
J1: Bottom Overlay "GND" at 84.694,152.365 h1 r90; Bottom Overlay "DISP_VDD" at 87.344,151.115 h1 r270